# Altium PCB Adaptator-PCB.PcbDoc
Units mm, origin at the board's own origin, x right, y up, seen from the top; angles counter-clockwise.
Board outline 78.99 x 35.56 mm, 2 copper layers (Top Layer, Bottom Layer); 9 components, 11 nets, 46 pads, 3 vias.
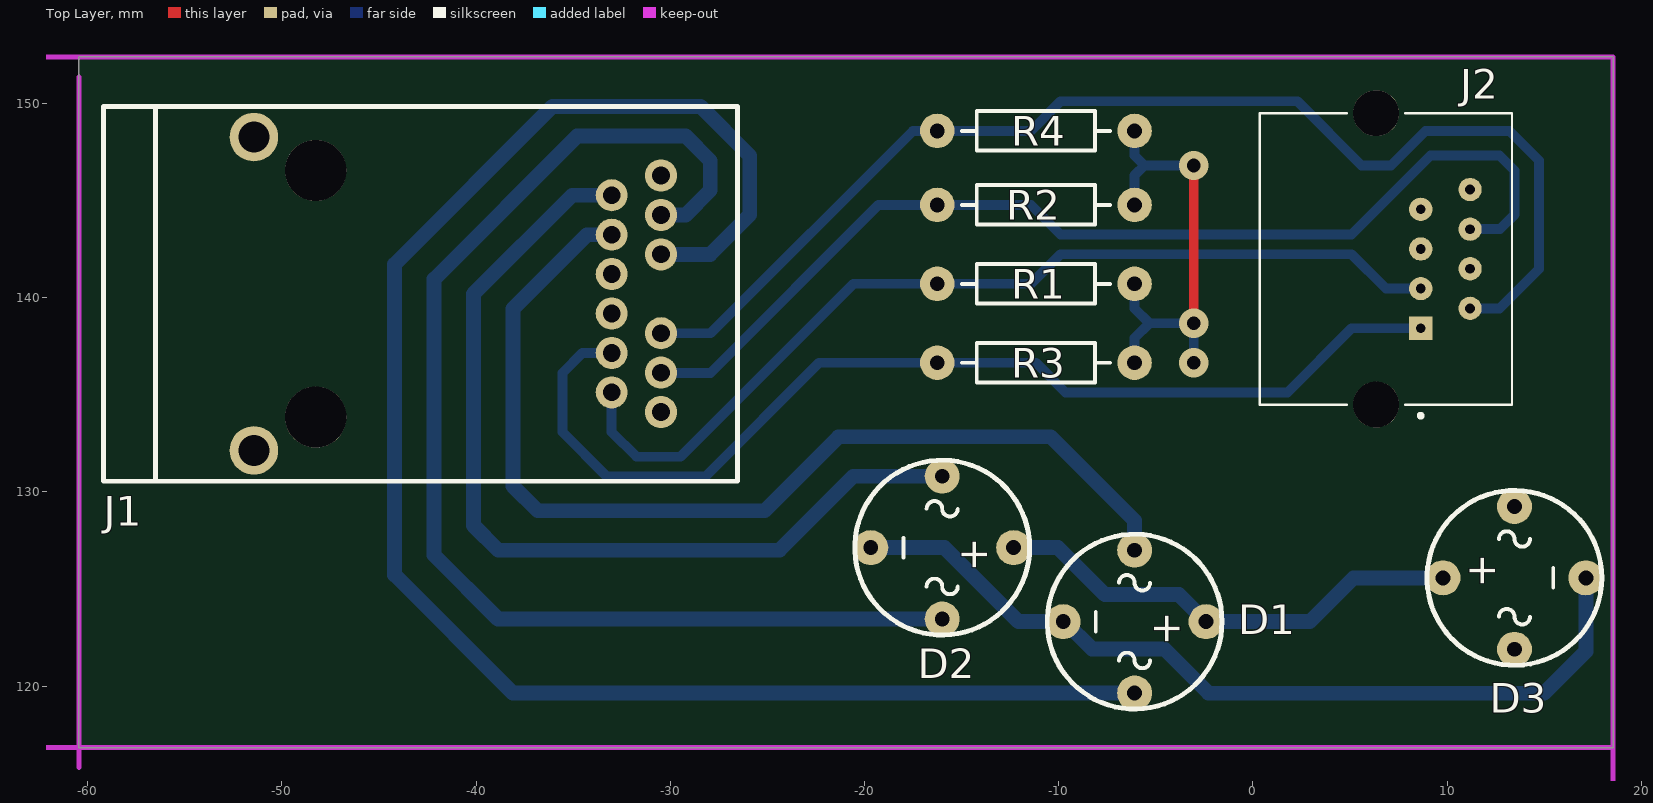
[diagram p0: Top Layer view]
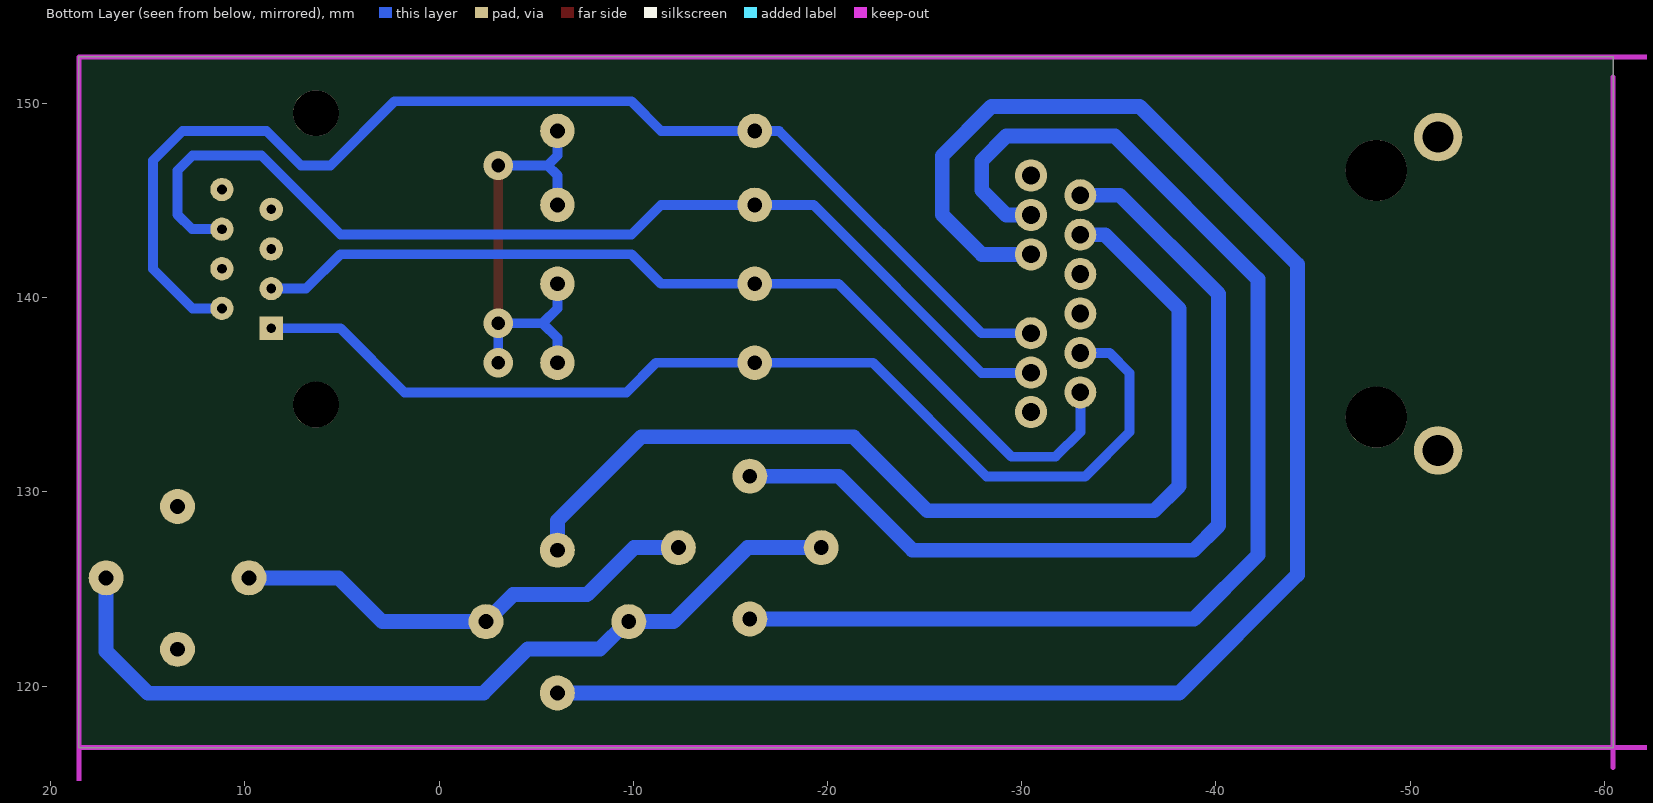
[diagram p1: Bottom Layer view, seen from below]

## Layer stack, top to bottom
Top Solder: solder mask 0.0102, Solder Resist, Dk 3.5
Top Layer: signal copper 0.0356
Dielectric 1: dielectric 0.32, FR-4, Dk 4.8
Bottom Layer: signal copper 0.0356
Bottom Solder: solder mask 0.0102, Solder Resist, Dk 3.5

## Board outline
-60.452,116.84 -60.452,152.4 18.542,152.4 18.542,116.84

## Design rules (kind name [scope] priority, off if disabled: settings)
Clearance [All] p1: gap=0.254 ignorepadtopadclearanceinfootprint=FALSE except(0: Arc-Hole Track-Hole SMDPad-Hole THPad-Hole Via-Hole Fill-Hole Poly-Hole Region-Hole Text-Hole)
PolygonConnect [All] p1: connectstyle=Relief reliefconductorwidth=0.254 reliefentries=4 polygonreliefangle="90 Angle" airgapwidth=0.254
RoutingVias [All] p1: holewidth=0.711 width=1.27 viastyle="Through Hole" minholewidth=0.711 minwidth=1.27 maxholewidth=0.711 maxwidth=1.5
SolderMaskExpansion [All] p1: expansion=0.102 istentingtop=FALSE
Width [All] p1: maxlimit=1.016 minlimit=0.508 preferedwidth=0.762
30 further rules are at their usual default settings.

## Components (designator, comment, footprint, x,y, rotation, side; value= is the part's Value field where it differs from the comment)
D1 "W10M" "PUENTE - W10M" -2.419,123.323 r270 top
D2 "W10M" "PUENTE - W10M" -12.325,127.133 r270 top
D3 "DNP" "PUENTE - W10M" 9.785,125.576 r90 top locked
J1 "RJ45" ARJP11C-MB -48.26,140.202 r270 top
J2 "DNP" CUI_CRJ032-1-TH 6.336,142 r270 top locked
R1 "50" RES400 -16.256,140.716 r0 top
R2 "50" RES400 -16.256,144.78 r0 top
R3 "50" RES400 -16.256,136.652 r0 top
R4 "50" RES400 -16.256,148.59 r0 top

## Footprints (in the part's own frame and the unit in brackets; to place one, negate y for a bottom-side part, rotate by r counter-clockwise, add the part's x,y. Pads: shape width x height; smd on the part's side, far side on the other; paste and mask are expansions set on the pad)
ARJP11C-MB [mil] "Magjack Conector for PoE"
  round 65 hole 36: 1(199.8,600) 2(119.88,600) 3(39.96,600) 4(-39.96,600) 5(-119.88,600) 6(-199.8,600) 7(239.76,700) 8(159.84,700) 9(79.92,700) 10(-79.92,700) 11(-159.84,700) 12(-239.76,700)
  round 124.02 hole 124.02: PAD(-250,0) PAD(250,0)
  round 98.43 hole 62.99: SHIELD(-317.52,-125.2) SHIELD(317.52,-125.2)
  silkscreen extent -380,-430 380,855
CUI_CRJ032-1-TH [mm]
  rect 1.2x1.2 hole 0.5: 1(3.57,2.3)
  round 1.2 hole 0.5: 2(2.55,4.84) 3(1.53,2.3) 4(0.51,4.84) 5(-0.51,2.3) 6(-1.53,4.84) 7(-2.55,2.3) 8(-3.57,4.84)
  round 2.36 hole 2.36 unplated: ""(-7.5,0) ""(7.5,0)
  silkscreen extent -7.5,-6 8.17,7
"PUENTE - W10M" [mm]
  round 1.8 hole 0.762: 1(0,0) 2(-3.677,-3.677) 3(0,-7.354) 4(3.677,-3.677)
  silkscreen extent -4.5,-8.17 4.5,0.82
RES400 [mil]
  round 70 hole 30: 1(0,0) 2(400,0)
  silkscreen extent 50,-40 350,40, body extent -12,-45 412,46, height 96

## Part data
D1 D2 D3: library part PUENTE
J1: library part ARJP11C-MBSC-L2, "Magjack Connector for PoE"
J2: library part CRJ032-1-TH, "8P8C, Single Port, Horizontal, Unshielded, No LED, Through Hole, RJ45 Modular Connector", Package=None, Availability="In Stock", Check_prices=https://www.snapeda.com/parts/CRJ032-1-TH/CUI%20Devices/view-part/6363031/?ref=eda, CUI_purchase_URL=https://www.cuidevices.com/product/interconnect/connectors/modular-connectors/rj45-connectors/crj032-1-th?utm_source=snapeda.com&utm_medium=referral&utm_campaign=snapedaBOM, MF="CUI Devices", MP=CRJ032-1-TH, Price=None, Purchase-URL=https://pricing.snapeda.com/search/part/CRJ032-1-TH/?ref=eda, SnapEDA_Link=https://www.snapeda.com/parts/CRJ032-1-TH/CUI%20Devices/view-part/6363031/?ref=snap
R1 R2 R3 R4: library part RES

## Via types
v1: diameter 1.5, hole 0.711, Top Layer to Bottom Layer, 3 vias

## Nets (pads, with @x,y where several pads share a name; then routed paths per layer and width w, separated by ;. In a path a pad name is that pad's centre, name@x,y a point inside that pad or via, vN(x,y) a via of type N, cw(c..) or ccw(c..) an arc to the next point about the centre after c; other vN are vias at no path point)
NetR1_2: R1.2 R2.2 R3.2 R4.2 | length 23.9
  Top Layer w0.508: v1(-3.048,138.684) v1(-3.048,146.812)
  Bottom Layer w0.508: R3.2 -6.096,137.922 -5.334,138.684 ; R1.2 -6.096,139.446 -5.334,138.684 ; R2.2 -6.096,146.304 -5.588,146.812 ; R4.2 -6.096,147.32 -5.588,146.812 ; v1(-3.048,136.652) v1(-3.048,138.684) -5.334,138.684 ; v1(-3.048,146.812) -5.588,146.812
RX+: J1.1 J2.3 R1.1 | length 49.3
  Bottom Layer w0.508: J1.1 -33.02,133.085 -31.75,131.815 -29.464,131.815 -20.563,140.716 R1.1 -11.43,140.716 -9.906,142.24 5.08,142.24 6.85,140.47 J2.3 J2.3@8.628,140.462
RX-: J1.8 J2.6 R2.1 | length 55
  Bottom Layer w0.508: J1.8 -30.471,136.133 -27.94,136.133 -19.293,144.78 R2.1 -11.43,144.78 -9.906,143.256 5.08,143.256 9.144,147.32 12.7,147.32 13.462,146.558 13.462,144.272 12.72,143.53 J2.6
TX+: J1.2 J2.1 R3.1 | length 55.6
  Bottom Layer w0.508: J1.2 -34.536,137.157 -35.56,136.133 -35.56,133.085 -33.274,130.799 -28.194,130.799 -22.341,136.652 R3.1 -11.176,136.652 -9.652,135.128 1.778,135.128 5.08,138.43 J2.1
TX-: J1.9 J2.2 R4.1 | length 62.9
  Bottom Layer w0.508: J1.9 -27.933,138.172 -17.515,148.59 R4.1 -11.43,148.59 -9.906,150.114 2.286,150.114 5.588,146.812 7.112,146.812 8.89,148.59 13.208,148.59 14.732,147.066 14.732,141.486 12.696,139.45 J2.2
VC1+: D1.2 J1.5 | length 53.2
  Bottom Layer w0.762: J1.5 -33.022,143.245 -34.29,143.245 -38.1,139.435 -38.1,130.302 -36.83,129.032 -25.146,129.032 -21.336,132.842 -10.414,132.842 -6.096,128.524 D1.2
VC1-: D1.4 J1.10 | length 87.8
  Bottom Layer w0.762: J1.10 -27.943,142.232 -25.908,144.267 -25.908,147.309 -28.448,149.849 -36.068,149.849 -44.196,141.721 -44.196,125.73 -38.112,119.646 D1.4
VC2+: D2.2 J1.6 | length 47.4
  Bottom Layer w0.762: J1.6 -35.052,145.277 -40.132,140.197 -40.132,128.27 -38.862,127 -24.384,127 -20.574,130.81 D2.2
VC2-: D2.4 J1.11 | length 64.1
  Bottom Layer w0.762: J1.11 J1.11 -29.21,144.261 -27.94,145.531 -27.94,147.055 -29.21,148.325 -34.798,148.325 -42.164,140.959 -42.164,126.746 -38.874,123.456 D2.4
VDD: D1.1 D2.1 D3.1 | length 24.6
  Bottom Layer w0.762: D2.1 -10.039,127.133 -7.62,124.714 -3.81,124.714 D1.1 2.927,123.323 5.18,125.576 D3.1 D3.1@9.769,125.593
VSS: D1.3 D2.3 D3.3 | length 44.5
  Bottom Layer w0.762: D2.3 -15.881,127.133 -12.071,123.323 D1.3 ; D1.3@-9.69,123.323 -8.287,121.92 -4.572,121.92 -2.286,119.634 14.986,119.634 17.139,121.787 D3.3
pads on no net: D3.2 D3.4 J1.3 J1.4 J1.7 J1.12 J1.PAD J1.SHIELD J2. J2.4 J2.5 J2.7 J2.8

## Keep-outs
Keep-Out Layer:
  lines w0.254: -60.452,115.813 -60.452,151.373 ; -73.66,116.84 -60.452,116.84 18.542,116.84 ; -73.66,116.84 -73.66,0 0,0 18.542,0 18.542,116.84 ; -73.66,116.84 -73.66,152.4 -60.452,152.4 18.542,152.4 18.542,116.84

## Text inside footprints (layer, text, board x,y; h text height)
D1: Top Overlay "+" at -5.096,123.823 h1.52 r270
D2: Top Overlay "+" at -15.002,127.633 h1.52 r270
D3: Top Overlay "+" at 12.462,125.076 h1.52 r90